# Altium PCB HV_DCDC_V2.PcbDoc (part 2 of 2)
Units mil, origin at the board's own origin, x right, y up, seen from the top; angles counter-clockwise.
Board outline 7131.02 x 4169.41 mil, 2 copper layers (Top Layer, Bottom Layer); 124 components, 83 nets, 337 pads, 14 vias.
Unrouted connection lines stored in the file: 231.
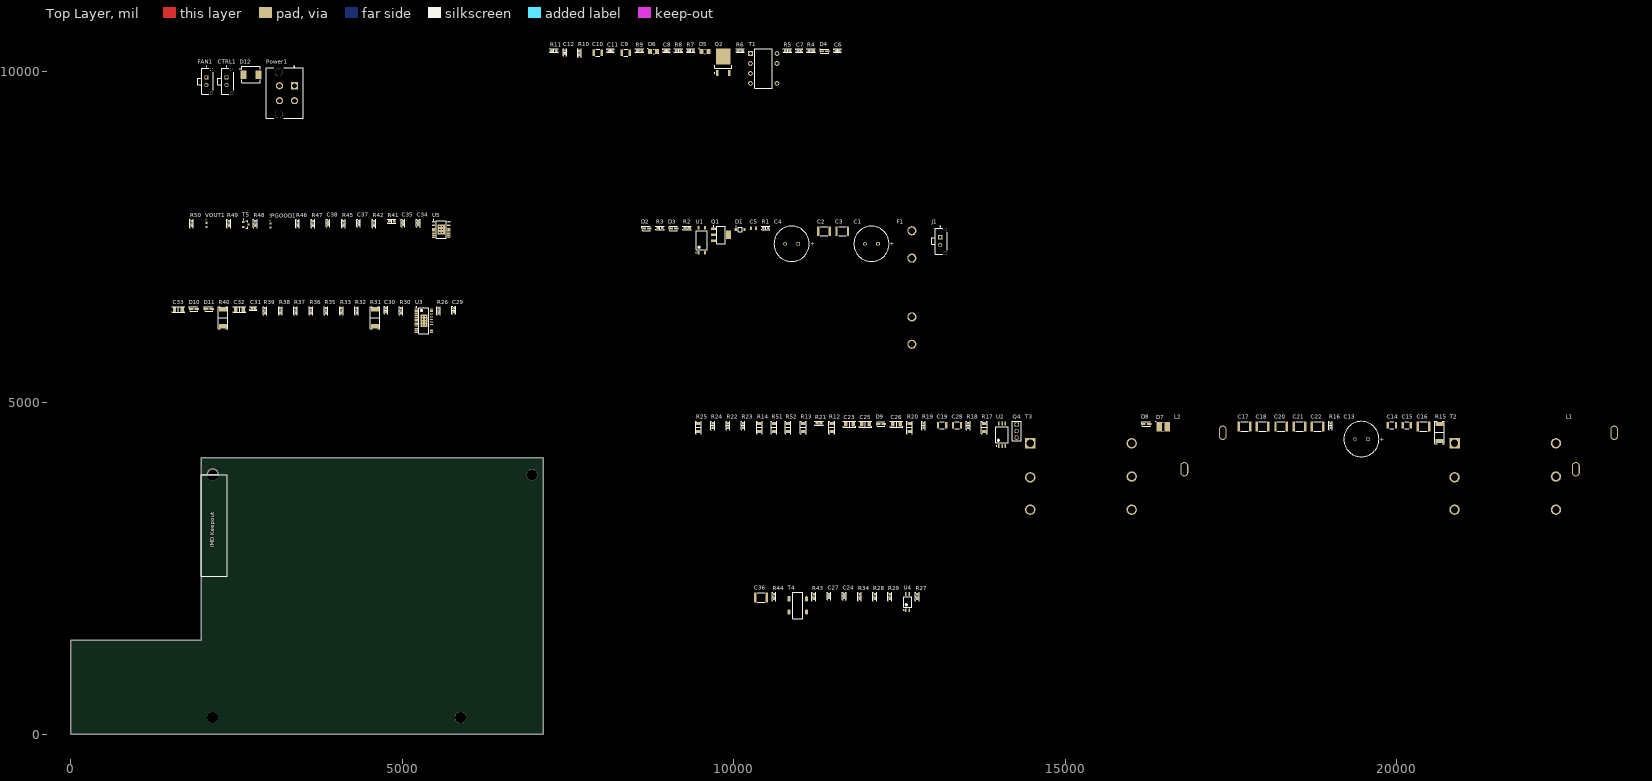
[diagram p0: Top Layer view]

## Via types
v1: diameter 19.68, hole 7.87, Top Layer to Bottom Layer, 14 vias

## Nets (pads, with @x,y where several pads share a name; then routed paths per layer and width w, separated by ;. In a path a pad name is that pad's centre, name@x,y a point inside that pad or via, vN(x,y) a via of type N, cw(c..) or ccw(c..) an arc to the next point about the centre after c; other vN are vias at no path point) (continued)
pads on no net: CTRL1. FAN1. J1. Power1. Q1.4 T1.2 T2.0 T2.7 T3.0 T3.7 U2.2 U3.6 U3.15 U3.16 U3.37

## Silkscreen, mask and mechanical layers (free items; w line width, h text height)
Top Overlay:
  lines w10: 1970,2380 2365,2380 2365,3915 1970,3915 1970,2380
  text "IMD Keepout" at 2165.01,2820 h60 r90

## Text inside footprints (layer, text, board x,y; h text height)
!PGOOD1: Top Overlay "+" at 3026.81,7754.25 h30 r180
C1: Top Overlay "+" at 12358.78,7365.98 h59.06
C4: Top Overlay "+" at 11153.78,7365.98 h59.06
C13: Top Overlay "+" at 19748.54,4420.98 h59.06
VOUT1: Top Overlay "+" at 2061.81,7764.25 h30 r180